# EAGLE board C_in_BRD (EAGLE 9.6.2)
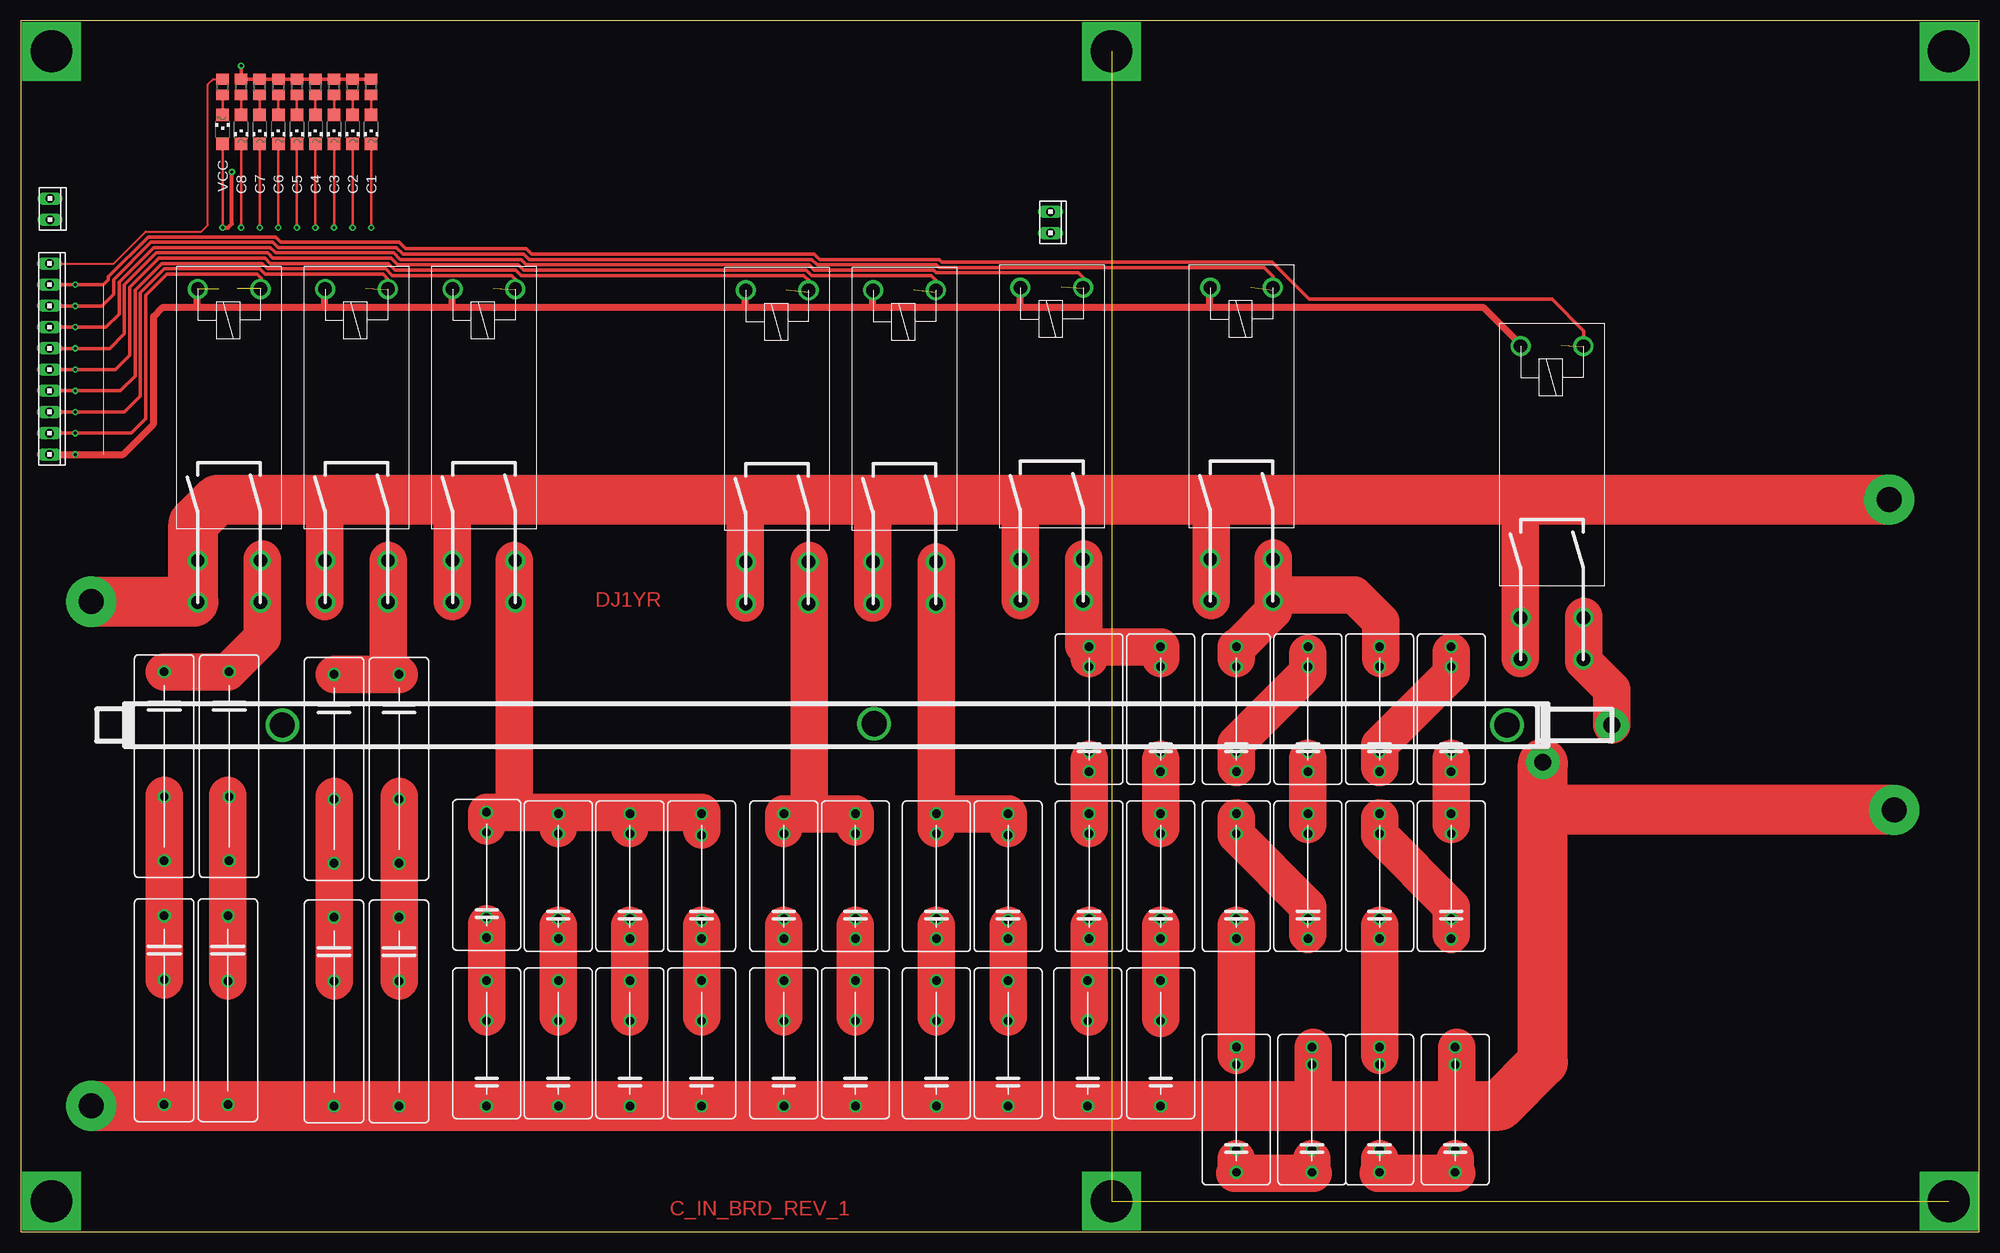
[diagram p0: board, top side]
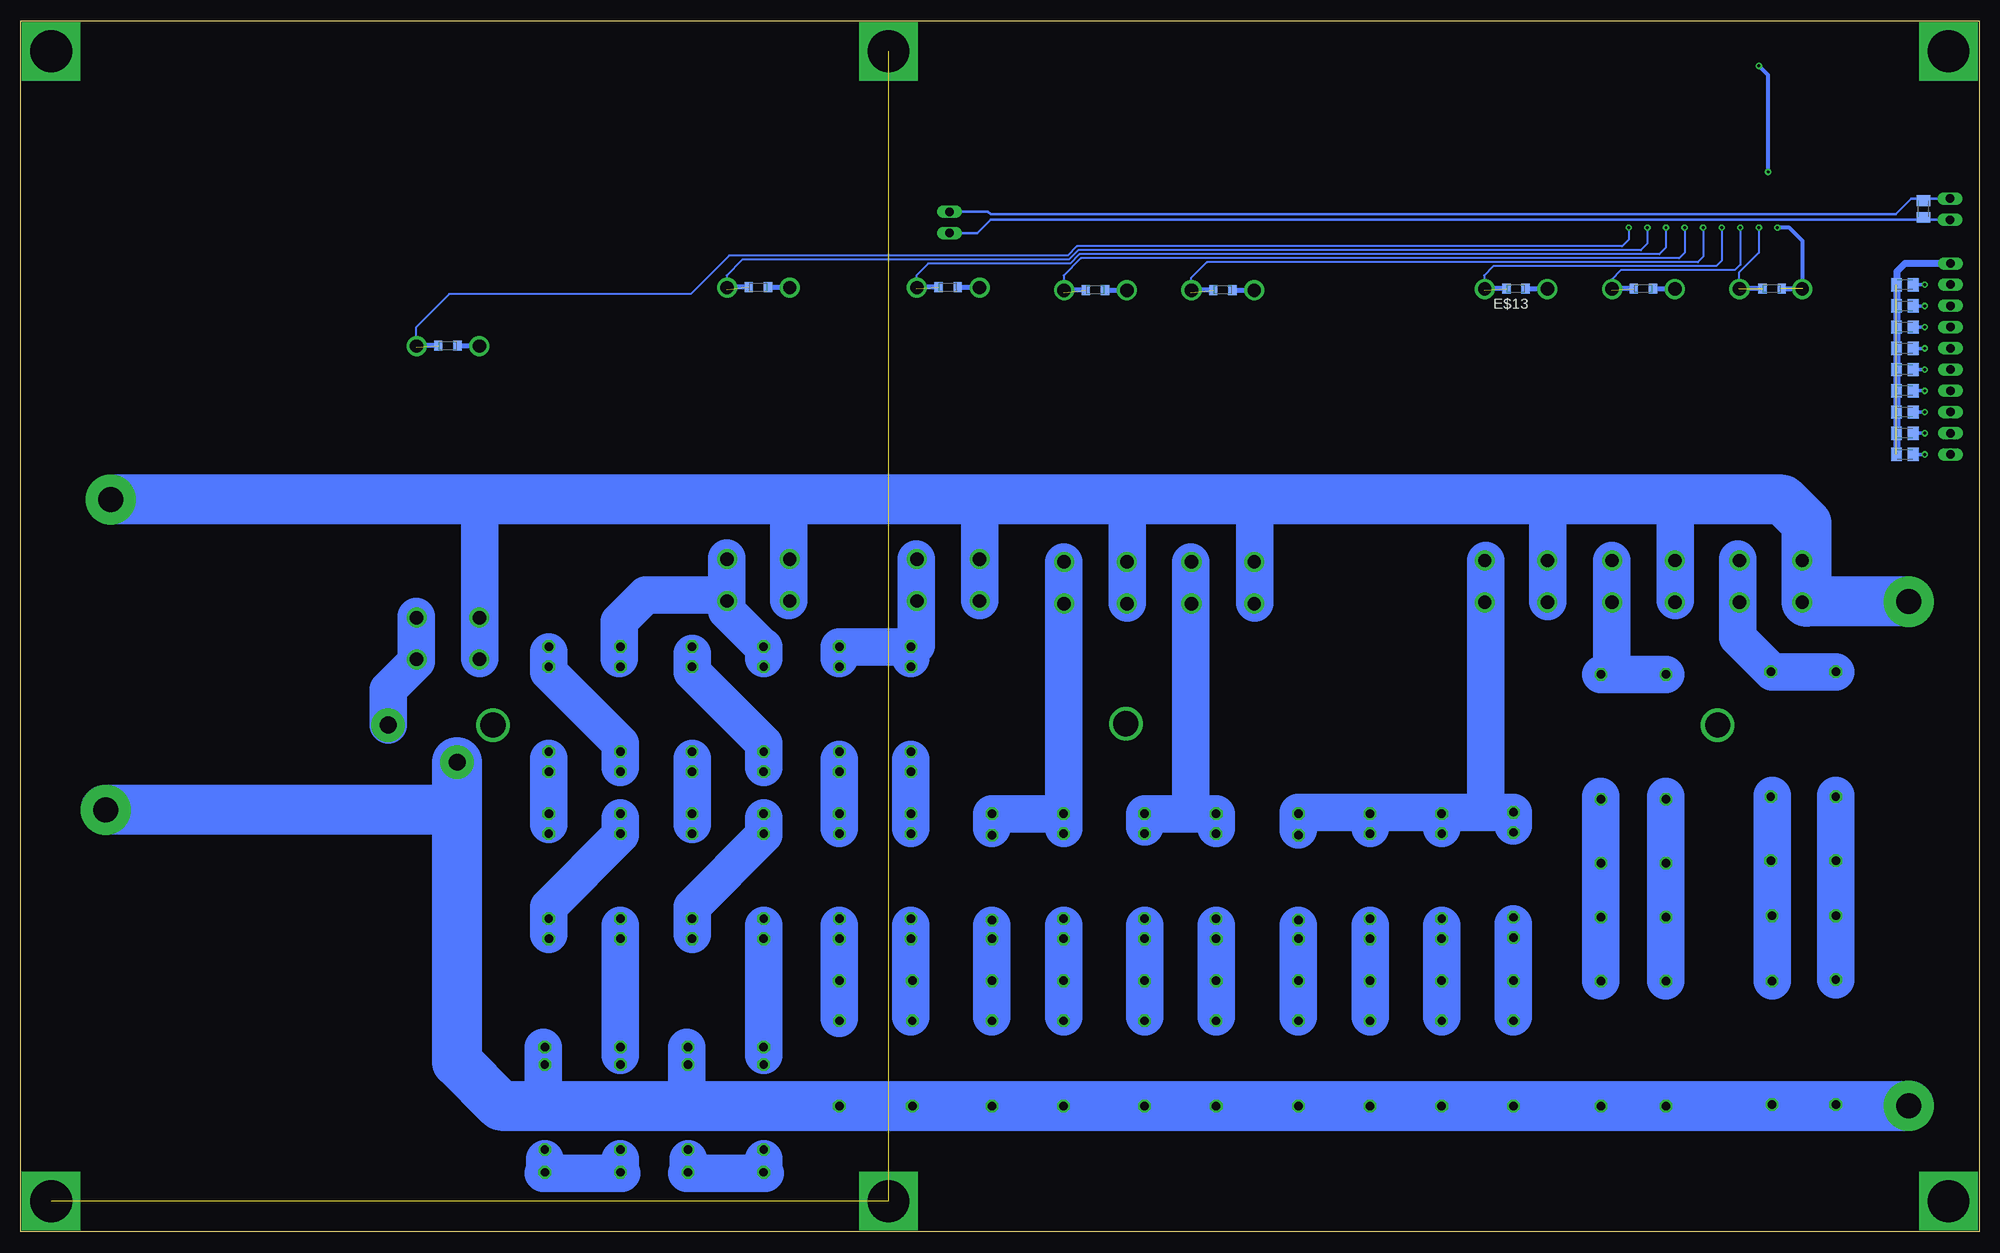
[diagram p1: board, bottom side, seen from below]

Size 234.29 x 144.92 mm. Coordinates in mm from the lower left corner, seen from the top.
Outline: 0,0 234.29,0 234.29,144.92 0,144.92 0,0
Copper layers (1*16): Top 0.035mm / dielectric 1.5mm / Bottom 0.035mm
Design rules "default *": minimum track width 6mil, minimum drill 0.35mm, track to track 6mil, track to pad 6mil, pad to pad 6mil, via to via 6mil, smd to smd 6mil, copper to edge 0mil, drill to drill 6mil, minimum pad ring 10mil, minimum via ring 8mil, stop-mask expansion 4mil, vias tented up to drill 0mil, thermal gap 10mil

## Footprints (pad centres in the part's own frame; a part is rotated, then mirrored left to right if it is on the bottom)
CHIPLED_1206 = smd 1.5 x 1.5: A 0,-1.75; C 0,1.75
C225-074X268 = drill 1.016 octagon: 1 -11.303,0; 2 11.303,0
C150-084X183 = drill 1.016 octagon: 1 -7.493,0; 2 7.493,0
10X10MTA = drill 1.016 long: 1 11.43,0; 2 8.89,0; 3 6.35,0; 4 3.81,0; 5 1.27,0; 6 -1.27,0; 7 -3.81,0; 8 -6.35,0; 9 -8.89,0; 10 -11.43,0
C0805K = smd 1.3 x 1.6: 1 -1,0; 2 1,0
SOD110-W = smd 1 x 1.2: A 1.15,0; C -1.15,0
10X02MTA = drill 1.016 long: 1 1.27,0; 2 -1.27,0
R0805 = smd 1.3 x 1.5: 1 -0.95,0; 2 0.95,0
FINDER45.91.7.024.0310 = drill 1.6: P$1 2.75,2.5; P$2 2.75,10; P$3 35.25,2.5; P$4 35.25,10; P$5 40.25,2.5; P$6 40.25,10

## Placement (x,y rotation side)
C1  [CHIPLED_1206]  41.91,131.92 180 top
C2  [CHIPLED_1206]  39.69,131.92 180 top
C3  [CHIPLED_1206]  37.47,131.92 180 top
C4  [CHIPLED_1206]  35.24,131.92 180 top
C5  [CHIPLED_1206]  33.02,131.92 180 top
C6  [CHIPLED_1206]  30.8,131.92 180 top
C7  [CHIPLED_1206]  28.57,131.92 180 top
C8  [CHIPLED_1206]  26.35,131.92 180 top
C_1  2200/2KV  [C225-074X268]  17.14,55.72 270 top
C_2  2200/2KV  [C225-074X268]  24.92,55.72 270 top
C_3  2200/2KV  [C225-074X268]  17.14,26.51 270 top
C_4  2200/2KV  [C225-074X268]  24.77,26.51 270 top
C_5  1000/2KV  [C225-074X268]  37.47,55.4 270 top
C_6  1000/2KV  [C225-074X268]  45.24,55.4 270 top
C_7  1000/2KV  [C225-074X268]  37.47,26.35 270 top
C_8  1000/2KV  [C225-074X268]  45.24,26.35 270 top
C_9  330/2KV  [C150-084X183]  55.72,42.7 90 top
C_10  330/2KV  [C150-084X183]  64.29,42.55 90 top
C_11  330/2KV  [C150-084X183]  55.72,22.54 90 top
C_12  330/2KV  [C150-084X183]  64.29,22.54 90 top
C_13  220/2KV  [C150-084X183]  72.87,42.55 90 top
C_14  220/2KV  [C150-084X183]  81.44,42.55 90 top
C_15  220/2KV  [C150-084X183]  72.87,22.54 90 top
C_16  220/2KV  [C150-084X183]  81.44,22.54 90 top
C_17  330/2KV  [C150-084X183]  91.28,42.55 90 top
C_18  330/2KV  [C150-084X183]  99.85,42.55 90 top
C_19  330/2KV  [C150-084X183]  91.28,22.54 90 top
C_20  330/2KV  [C150-084X183]  99.85,22.54 90 top
C_21  150/2KV  [C150-084X183]  109.54,42.55 90 top
C_22  150/2KV  [C150-084X183]  118.11,42.55 90 top
C_23  150/2KV  [C150-084X183]  109.54,22.54 90 top
C_24  150/2KV  [C150-084X183]  118.11,22.54 90 top
C_25  100/2KV  [C150-084X183]  127.79,62.55 90 top
C_26  100/2KV  [C150-084X183]  136.37,62.55 90 top
C_27  100/2KV  [C150-084X183]  127.79,42.55 90 top
C_28  100/2KV  [C150-084X183]  136.37,42.55 90 top
C_29  100/2KV  [C150-084X183]  127.64,22.54 90 top
C_30  100/2KV  [C150-084X183]  136.37,22.54 90 top
C_31  100/2KV  [C150-084X183]  145.41,62.55 90 top
C_32  100/2KV  [C150-084X183]  153.99,62.55 90 top
C_33  100/2KV  [C150-084X183]  145.41,42.55 90 top
C_34  100/2KV  [C150-084X183]  153.99,42.55 90 top
C_35  100/2KV  [C150-084X183]  145.41,14.61 90 top
C_36  100/2KV  [C150-084X183]  154.46,14.61 90 top
C_37  100/2KV  [C150-084X183]  162.56,62.55 90 top
C_38  100/2KV  [C150-084X183]  171.13,62.55 90 top
C_39  100/2KV  [C150-084X183]  162.56,42.55 90 top
C_40  100/2KV  [C150-084X183]  171.13,42.55 90 top
C_41  100/2KV  [C150-084X183]  162.56,14.61 90 top
C_42  100/2KV  [C150-084X183]  171.61,14.61 90 top
E$1  [10X10MTA]  3.43,104.47 270 top
E$2  [C0805K]  8.89,93.03 180 bottom
E$3  [C0805K]  8.89,95.57 180 bottom
E$4  [C0805K]  8.89,98.11 180 bottom
E$5  [C0805K]  8.89,100.65 180 bottom
E$6  [C0805K]  8.89,103.19 180 bottom
E$7  [C0805K]  8.89,105.73 180 bottom
E$8  [C0805K]  8.89,108.27 180 bottom
E$9  [C0805K]  8.89,110.81 180 bottom
E$10  [C0805K]  8.89,113.35 180 bottom
E$11  [SOD110-W]  24.77,112.87 180 bottom
E$12  [SOD110-W]  40.16,112.87 180 bottom
E$13  [SOD110-W]  55.4,112.87 180 bottom
E$14  [SOD110-W]  90.49,112.71 180 bottom
E$15  [SOD110-W]  105.73,112.71 180 bottom
E$16  [SOD110-W]  123.35,113.03 180 bottom
E$17  [SOD110-W]  146.05,113.03 180 bottom
E$18  [SOD110-W]  183.2,106.05 180 bottom
E$19  [10X02MTA]  3.49,122.4 270 top
E$20  [C0805K]  6.67,122.4 270 bottom
E$21  [10X02MTA]  123.19,120.81 270 top
E$22  [R0805]  24.13,137 90 top
E$23  [R0805]  26.35,137 90 top
E$24  [R0805]  28.57,137 90 top
E$25  [R0805]  30.8,137 90 top
E$26  [R0805]  33.02,137 90 top
E$27  [R0805]  35.24,137 90 top
E$28  [R0805]  37.47,137 90 top
E$29  [R0805]  39.69,137 90 top
E$30  [R0805]  41.91,137 90 top
U$1  FINDER45.91.7.024.0310  [FINDER45.91.7.024.0310]  176.94,108.75 270 top
U$2  FINDER45.91.7.024.0310  [FINDER45.91.7.024.0310]  139.79,115.74 270 top
U$3  FINDER45.91.7.024.0310  [FINDER45.91.7.024.0310]  117.09,115.74 270 top
U$4  FINDER45.91.7.024.0310  [FINDER45.91.7.024.0310]  99.47,115.42 270 top
U$5  FINDER45.91.7.024.0310  [FINDER45.91.7.024.0310]  84.23,115.42 270 top
U$6  FINDER45.91.7.024.0310  [FINDER45.91.7.024.0310]  49.15,115.58 270 top
U$7  FINDER45.91.7.024.0310  [FINDER45.91.7.024.0310]  33.91,115.58 270 top
U$8  FINDER45.91.7.024.0310  [FINDER45.91.7.024.0310]  18.67,115.58 270 top
VCC  [CHIPLED_1206]  24.13,131.92 0 top

## Library data of the parts
C1-C8 VCC = led
C_1-C_42 E$2-E$10 E$20 E$22-E$30 = rcl
E$1 E$19 E$21 = con-amp
E$11-E$18 = diode
U$1-U$8 = Finder 45.91.7.024.0310

## Nets
S$24: E$2.2 E$3.2 E$4.2 E$5.2 E$6.2 E$7.2 E$8.2 E$9.2 E$10.2
S$96: E$19.1
S$97: E$19.2 E$21.2

## Tracks (layer width: path | path; a pad name or v marks a point on that pad's centre or on a via)
+24V  (via drill 0.35)  (1 unrouted)
  Top 0.305: 24.13,130.18 v24.13,120.17
  Top 0.406: v26.35,139.54 26.35,137.95 | 26.35,137.95 26.35,137.79 | 26.35,137.95 41.91,137.95
  Top 0.508: v24.13,120.17 24.77,120.17 25.24,120.65 v25.24,126.84
  Top 0.813: 3.33,93.03 v6.51,93.03 12.22,93.03 15.88,96.68 15.88,109.54 16.99,110.65 21.11,110.65 | 21.11,110.65 36.35,110.65 | 36.35,110.65 51.59,110.65 | 51.59,110.65 86.68,110.65 | 86.68,110.65 101.92,110.65 | 101.92,110.65 119.54,110.65 | 119.54,110.65 142.24,110.65 | 21.11,110.65 21.11,112.87 | 36.35,110.65 v36.35,112.87 | 51.59,110.65 v51.59,112.87 | 86.68,110.65 v86.68,112.71 | 101.92,110.65 v101.92,112.71 | 119.54,110.65 v119.54,113.03 | 142.24,110.65 v142.24,113.03 | 142.24,110.65 174.94,110.65 v179.55,106.05
  Bottom 0.406: 6.67,93.03 v6.51,93.03 8.1,93.03
  Bottom 0.508: 21.11,112.87 21.11,118.59 22.7,120.17 v24.13,120.17 | v25.24,126.84 25.24,138.43 v26.35,139.54
  Bottom 0.61: 144.94,113.03 v142.24,113.03 | 122.24,113.03 v119.54,113.03 | 104.62,112.71 v101.92,112.71 | 89.38,112.71 v86.68,112.71 | 54.29,112.87 v51.59,112.87 | 39.05,112.87 v36.35,112.87 | 23.65,112.87 21.11,112.87 | 182.09,106.05 v179.55,106.05
C1  (via drill 0.35)  (1 unrouted)
  Top 0.305: 41.91,130.18 v41.91,120.17
  Top 0.406: 3.49,113.35 v6.51,113.35 9.84,113.35 10.48,113.98 10.48,114.3 15.24,119.06 30.48,119.06 31.11,118.43 45.24,118.43 46.04,117.63 60.48,117.63 61.12,117 94.93,117 95.57,116.36 109.86,116.36 110.17,116.05 149.7,116.05 154.15,111.6 183.2,111.6 187.01,107.79 187.01,105.89
  Bottom 0.254: v41.91,120.17 41.91,118.75 42.7,117.95 107.95,117.95 109.06,116.84 149.54,116.84 154.15,112.24 183.04,112.24 187.01,108.27 187.01,106.05
  Bottom 0.406: v6.51,113.35 7.78,113.35
  Bottom 0.61: 184.31,106.05 187.01,106.05
C2  (via drill 0.35)  (1 unrouted)
  Top 0.406: 3.49,110.81 v6.51,110.81 9.68,110.81 11.11,112.24 11.11,113.98 15.56,118.43 30.16,118.43 30.8,117.79 44.93,117.79 45.72,117 60.17,117 60.8,116.36 94.61,116.36 95.25,115.73 109.54,115.73 109.86,115.41 148.75,115.41 149.86,114.3 149.86,112.71
  Bottom 0.254: v39.69,120.17 39.69,118.27 40.48,117.47 107.79,117.47 108.9,116.36 147.96,116.36 149.86,114.46 149.86,113.03
  Bottom 0.406: v6.51,110.81 7.94,110.81
  Bottom 0.61: 147.16,113.03 149.86,113.03
C3  (via drill 0.35)  (1 unrouted)
  Top 0.406: 3.49,108.27 v6.51,108.27 10.16,108.27 11.75,109.86 11.75,113.67 15.88,117.79 29.84,117.79 30.48,117.16 44.61,117.16 45.4,116.36 59.85,116.36 60.48,115.73 94.3,115.73 94.93,115.09 109.22,115.09 109.54,114.78 126.52,114.78 127.16,114.14 127.16,112.87
  Bottom 0.254: v37.47,120.17 37.47,117.79 38.26,117 107.63,117 108.74,115.89 125.73,115.89 127.16,114.46 127.16,113.03
  Bottom 0.406: v6.51,108.27 7.78,108.27
  Bottom 0.61: 124.46,113.03 127.16,113.03
C4  (via drill 0.35)  (1 unrouted)
  Top 0.406: 3.33,105.73 v6.51,105.73 10.64,105.73 12.38,107.47 12.38,113.35 16.19,117.16 29.53,117.16 30.16,116.52 44.29,116.52 45.09,115.73 59.53,115.73 60.17,115.09 93.98,115.09 94.61,114.46 108.9,114.46 109.54,113.82 109.54,112.39
  Bottom 0.254: v35.24,120.17 35.24,117.16 35.88,116.52 107.47,116.52 109.54,114.46 109.54,112.71
  Bottom 0.406: v6.51,105.73 7.94,105.73
  Bottom 0.61: 106.84,112.71 109.54,112.71
C5  (via drill 0.35)  (1 unrouted)
  Top 0.406: 94.3,112.39 94.3,113.82 93.66,114.46 59.85,114.46 59.21,115.09 44.77,115.09 43.97,115.89 29.84,115.89 29.21,116.52 16.51,116.52 13.02,113.03 13.02,104.93 11.27,103.19 v6.51,103.19 3.49,103.19
  Bottom 0.254: v33.02,120.17 33.02,116.68 33.66,116.05 92.39,116.05 94.3,114.14 94.3,112.71
  Bottom 0.406: v6.51,103.19 7.94,103.19
  Bottom 0.61: 91.6,112.71 94.3,112.71
C6  (via drill 0.35)  (1 unrouted)
  Top 0.406: 59.21,112.71 59.21,113.98 58.74,114.46 44.45,114.46 43.66,115.25 29.53,115.25 28.89,115.89 16.83,115.89 13.65,112.71 13.65,102.39 11.91,100.65 v6.51,100.65 3.49,100.65
  Bottom 0.254: v30.8,120.17 30.8,116.2 31.43,115.57 58.1,115.57 59.21,114.46 59.21,112.87
  Bottom 0.406: v6.51,100.65 7.94,100.65
  Bottom 0.61: 56.52,112.87 59.21,112.87
C7  (via drill 0.35)  (1 unrouted)
  Top 0.406: 43.97,112.71 43.97,113.98 43.34,114.62 29.21,114.62 28.57,115.25 17.14,115.25 14.29,112.39 14.29,100.01 12.38,98.11 v6.51,98.11 3.49,98.11
  Bottom 0.254: v28.57,120.17 28.57,115.73 29.21,115.09 42.86,115.09 43.97,113.98 43.97,112.87
  Bottom 0.406: v6.51,98.11 7.94,98.11
  Bottom 0.61: 41.27,112.87 43.97,112.87
C8  (via drill 0.35)  (1 unrouted)
  Top 0.406: 28.73,112.87 28.73,114.14 28.26,114.62 17.46,114.62 14.92,112.08 14.92,97.31 13.18,95.57 v6.51,95.57 3.49,95.57
  Bottom 0.254: v26.35,120.17 26.35,117.16 28.73,114.78 28.73,112.87
  Bottom 0.406: v6.51,95.57 7.94,95.57
  Bottom 0.61: 25.88,112.87 28.73,112.87
GND
  Bottom 0.813: 3.49,115.89 8.89,115.89 9.84,114.94 9.84,93.03
N$43  (via drill 3 pad 6)
  Top 4.5: 154.62,22.07 154.62,15.24 154.78,15.08 | 171.77,22.07 171.77,15.08
  Top 6: v8.41,15.08 154.78,15.08 171.77,15.08 176.85,15.08 182.09,20.32 182.09,56.04
  Bottom 6: v8.41,15.08 176.85,15.08 182.09,20.32 182.09,56.2
S$1
  Bottom 4.5: 37.47,30 37.47,52.07
S$2
  Bottom 4.5: 28.89,80.49 28.89,71.12 24.77,66.99 17.14,66.99
S$3
  Bottom 4.5: 24.77,30 24.77,52.23
S$4
  Bottom 4.5: 45.24,30 45.24,52.07
S$5
  Bottom 4.5: 64.29,25.72 64.29,36.67
S$6
  Bottom 4.5: 37.47,66.67 43.97,66.67 | 43.97,66.67 45.24,66.67 | 43.97,80.33 43.97,66.67
S$7
  Bottom 4.5: 59.05,80.33 59.05,50.32
S$8
  Bottom 4.5: 55.88,50.16 72.87,50.16 | 72.87,50.16 81.44,50.16 | 72.87,50.16 72.87,48.26
S$9  (via drill 3 pad 6)
  Top 6: v8.41,75.41 20.64,75.41 20.64,84.77 23.5,87.63 v223.52,87.63
  Bottom 4.5: 36.35,75.56 36.35,87.63 | 51.59,75.41 51.59,87.63 | 179.39,68.58 179.39,87.63
  Bottom 6: v8.41,75.41 20.64,75.41 20.64,84.77 23.5,87.63 36.35,87.63 51.59,87.63 179.39,87.63 v223.52,87.63
S$10
  Bottom 4.5: 127.16,80.49 127.16,70.17 127.32,70.01 127.79,70.01 | 127.79,70.01 136.37,70.01 136.37,68.58 | 127.79,70.01 127.79,68.58
S$11
  Bottom 4.5: 99.85,48.42 99.85,50.01 91.28,50.01 91.28,48.26
S$12  (via drill 3 pad 6)
  Top 6: v224.16,50.48 183.36,50.48
S$13
  Top 4.5: 17.14,66.99 24.77,66.99 28.89,71.12 28.89,80.49
S$14
  Top 4.5: 36.35,75.41 36.35,86.2
S$15
  Top 4.5: 43.97,80.33 43.97,66.67 | 43.97,66.67 45.24,66.67 | 43.97,66.67 37.47,66.67
S$16
  Bottom 4.5: 109.54,50.01 118.11,50.01 118.11,48.26 | 109.54,80.17 109.54,50.01 | 109.54,50.01 109.54,48.26
S$17
  Bottom 4.5: 145.73,70.17 149.86,74.3 149.86,76.2 | 149.86,76.2 149.86,80.64 | 149.86,76.2 159.54,76.2 162.72,73.03 162.72,68.58
S$18
  Bottom 4.5: 145.41,55.56 145.41,58.42 153.99,66.99 153.99,69.22
S$19
  Bottom 4.5: 153.99,48.74 153.99,56.67
S$20
  Bottom 4.5: 145.41,49.53 145.41,47.47 153.99,38.89 153.99,35.56
S$21
  Bottom 4.5: 145.41,36.67 145.41,21.11
S$22
  Bottom 4.5: 145.26,6.99 154.62,6.99
S$23
  Bottom 4.5: 154.62,22.07 154.62,15.24
S$24  (8 unrouted)
S$25
  Bottom 4.5: 162.56,55.56 162.56,58.42 171.13,66.99 171.13,69.37
S$26
  Bottom 4.5: 171.13,48.74 171.13,56.67
S$27
  Bottom 4.5: 162.56,49.53 162.56,47.47 171.13,38.89 171.13,35.56
S$28
  Bottom 4.5: 162.56,36.67 162.56,21.11
S$29
  Bottom 4.5: 162.4,6.99 171.77,6.99
S$30
  Bottom 4.5: 171.77,22.07 171.77,15.24
S$31
  Top 4.5: 51.59,75.41 51.59,87.95
S$32
  Top 4.5: 59.05,80.33 59.05,50.16 | 59.05,50.16 55.88,50.16 | 59.05,50.16 81.44,50.16
S$33
  Top 4.5: 86.68,75.25 86.68,87.47
S$34
  Top 4.5: 94.3,80.33 94.3,50.01 | 94.3,50.01 91.28,50.01 91.28,48.26 | 94.3,50.01 99.85,50.01 99.85,48.42
S$35  (via drill 2 pad 4)
  other vias: 182.09,56.2
S$36
  Top 4.5: 101.92,75.25 101.92,86.52
S$37  (via drill 3 pad 4)
  other vias: 31.27,60.64
S$38  (via drill 3 pad 4)
  other vias: 102.08,60.8
S$39  (via drill 3 pad 4)
  other vias: 177.8,60.64
S$40
  Top 4.5: 109.54,25.72 109.54,36.67
S$41
  Top 4.5: 109.54,80.17 109.54,50.01 | 109.54,50.01 118.11,50.01 118.11,48.26 | 109.54,50.01 109.54,48.26
S$42
  Top 4.5: 119.54,75.56 119.54,88.27
S$43  (via drill 5 pad 7)
  other vias: 3.65,141.29
S$44  (via drill 5 pad 7)
  other vias: 3.65,3.65
S$45  (via drill 5 pad 7)  (2 unrouted)
  other vias: 230.66,3.65 130.49,3.65 130.49,141.29
S$46  (via drill 5 pad 7)
  other vias: 230.66,141.29
S$47
  Bottom 4.5: 94.3,80.17 94.3,50.32
S$48
  Top 4.5: 127.16,80.49 127.16,70.17 127.32,70.01 136.37,70.01 136.37,68.58
S$49
  Top 4.5: 142.4,75.56 142.4,87.47
S$50
  Top 4.5: 145.57,70.01 149.86,74.3 149.86,80.64
S$51
  Top 4.5: 151.29,76.2 159.54,76.2 162.72,73.03 162.72,68.58
S$52
  Top 4.5: 179.39,68.58 179.39,87.47
S$53  (via drill 2 pad 4)
  Top 4.5: 187.01,73.66 187.01,68.26 190.34,64.93 v190.34,60.64
  Bottom 4.5: 187.01,73.66 187.01,68.26 190.34,64.93 v190.34,60.64
S$54
  Top 4.5: 17.14,30.16 17.14,52.23
S$55
  Top 4.5: 24.77,30 24.77,52.23
S$56
  Top 4.5: 37.47,30 37.47,52.07
S$57
  Top 4.5: 45.24,30 45.24,52.07
S$58
  Top 4.5: 55.72,25.72 55.72,36.83
S$59
  Top 4.5: 64.29,25.72 64.29,36.67
S$60
  Top 4.5: 72.87,25.72 72.87,36.67
S$61
  Top 4.5: 81.44,25.72 81.44,36.67
S$62
  Top 4.5: 91.28,25.72 91.28,36.67
S$63
  Top 4.5: 99.85,25.72 99.85,36.67
S$64
  Top 4.5: 118.11,25.72 118.11,36.67
S$65
  Top 4.5: 127.79,25.72 127.79,36.67
S$66
  Top 4.5: 136.37,25.56 136.37,36.67
S$67
  Top 4.5: 145.41,21.11 145.41,36.67
S$68
  Top 4.5: 162.56,21.11 162.56,36.67
S$69
  Top 4.5: 171.13,35.56 171.13,38.89 162.56,47.47 162.56,49.53
S$70
  Top 4.5: 153.99,35.56 153.99,38.89 145.41,47.47 145.41,49.53
S$71
  Top 4.5: 127.79,48.26 127.79,56.52
S$72
  Top 4.5: 136.37,48.26 136.37,56.52
S$73
  Top 4.5: 153.99,48.74 153.99,56.67
S$74
  Top 4.5: 171.13,48.74 171.13,56.67
S$75
  Top 4.5: 162.56,55.56 162.56,58.26 171.13,66.83 171.13,69.37
S$76
  Top 4.5: 145.41,55.56 145.41,58.42 153.99,66.99 153.99,69.22
S$77
  Top 4.5: 145.26,6.99 145.41,6.99 | 145.41,6.99 154.62,6.99 | 145.41,6.99 145.41,8.73
S$78
  Top 4.5: 162.4,6.99 171.77,6.99
S$79
  Bottom 4.5: 142.4,75.56 142.4,87.47
S$80
  Bottom 4.5: 119.54,75.56 119.54,87.47
S$81
  Bottom 4.5: 101.92,75.25 101.92,87.47
S$82
  Bottom 4.5: 86.68,75.25 86.68,87.47
S$83
  Bottom 6: 182.25,50.32 182.4,50.48 224.16,50.48
S$84
  Bottom 4.5: 17.14,30.16 17.14,52.23
S$85
  Bottom 4.5: 127.79,48.26 127.79,56.52
S$86
  Bottom 4.5: 136.37,48.26 136.37,56.52
S$87
  Bottom 4.5: 136.37,25.56 136.37,36.67
S$88
  Bottom 4.5: 127.79,25.72 127.79,36.67
S$89
  Bottom 4.5: 118.11,25.72 118.11,36.67
S$90
  Bottom 4.5: 109.54,25.72 109.54,36.67
S$91
  Bottom 4.5: 99.85,25.72 99.85,36.67
S$92
  Bottom 4.5: 91.28,25.72 91.28,36.67
S$93
  Bottom 4.5: 81.44,25.72 81.44,36.67
S$94
  Bottom 4.5: 72.87,25.72 72.87,36.67
S$95
  Bottom 4.5: 55.72,25.72 55.72,36.83
S$96
  Bottom 0.305: E$19.1 118.27,121.13 119.86,119.54 123.19,119.54
S$97
  Bottom 0.305: E$19.2 8.1,123.67 10,121.76 118.27,121.76 118.59,122.08 E$21.2
S$98
  Top 0.254: 3.49,115.89 11.11,115.89 14.92,119.7 21.59,119.7 22.38,120.49 22.38,137.32 23.02,137.95 24.13,137.95
S$101  (via drill 1)
  other vias: 17.14,30.16
S$102
  Top 4.5: 154.46,7.14 154.46,8.73
S$103  (via drill 1)
  other vias: 24.77,30
S$104
  Top 4.5: 162.56,7.14 162.56,8.73
S$105  (via drill 1)
  other vias: 37.47,30
S$106
  Top 0.305: 26.35,130.18 26.35,120.17
S$107
  Top 0.305: 28.57,130.18 28.57,120.17
S$108
  Top 0.305: 30.8,130.18 30.8,120.17
S$109
  Top 0.305: 33.02,130.18 33.02,120.17
S$110
  Top 0.305: 35.24,130.18 35.24,120.17
S$111
  Top 0.305: 37.47,130.18 37.47,120.17
S$112
  Top 0.305: 39.69,130.18 39.69,120.17
S$113
  Top 4.5: 171.61,7.14 171.61,8.73
S$114
  Top 0.305: 24.13,133.51 24.13,136.05
S$115
  Top 0.305: 26.35,133.67 26.35,136.05
S$116
  Top 0.305: 28.57,133.67 28.57,136.05
S$117
  Top 0.305: 30.8,133.83 30.8,136.05
S$118
  Top 0.305: 33.02,133.67 33.02,136.05
S$119
  Top 0.305: 35.24,133.83 35.24,136.05
S$120
  Top 0.305: 37.47,133.67 37.47,136.05
S$121
  Top 0.305: 39.69,133.67 39.69,136.05
S$122
  Top 0.305: 41.91,133.67 41.91,136.05
S$123  (via drill 1)
  other vias: 45.24,30
S$124
  Top 4.5: 127.79,70.17 127.79,68.58
S$125  (via drill 1)
  other vias: 55.72,25.24
S$126  (via drill 1)
  other vias: 17.14,52.07
S$127
  Top 4.5: 145.41,70.01 145.41,68.58
S$128  (via drill 1)
  other vias: 24.92,52.07
S$129  (via drill 1)
  other vias: 64.29,25.24
S$130  (via drill 1)
  other vias: 37.47,51.75
S$131
  Top 4.5: 55.72,50.16 55.72,48.58
S$132  (via drill 1)
  other vias: 45.24,51.75
S$133  (via drill 1)
  other vias: 72.87,25.24
S$134
  Top 4.5: 64.29,50.01 64.29,48.26
S$135  (via drill 1)
  other vias: 81.44,25.24
S$136
  Top 4.5: 72.87,50.01 72.87,48.26
S$137  (via drill 1)
  other vias: 91.28,25.24
S$138
  Top 4.5: 81.44,50.01 81.44,48.1
S$139  (via drill 1)
  other vias: 109.54,25.24
S$140
  Bottom 4.5: 145.41,7.14 145.41,8.73
S$141  (via drill 1)
  other vias: 118.11,25.24
S$142
  Bottom 4.5: 154.46,7.14 154.46,8.73
S$143  (via drill 1)
  other vias: 127.64,25.24
S$144
  Bottom 4.5: 162.56,7.14 162.56,8.73
S$145  (via drill 1)
  other vias: 136.37,25.24
S$146
  Bottom 4.5: 171.61,7.14 171.61,8.73
S$147  (via drill 1)
  other vias: 145.41,20
S$148  (via drill 1)
  other vias: 145.41,9.84
S$149  (via drill 1)
  other vias: 154.46,20
S$150  (via drill 1)
  other vias: 154.46,9.84
S$151  (via drill 1)
  other vias: 162.56,20
S$152  (via drill 1)
  other vias: 162.56,9.84
S$153  (via drill 1)
  other vias: 171.61,20
S$154  (via drill 1)
  other vias: 171.61,9.84
S$155  (via drill 1)
  other vias: 171.13,47.62
S$156  (via drill 1)
  other vias: 171.13,37.47
S$157  (via drill 1)
  other vias: 162.56,47.62
S$158  (via drill 1)
  other vias: 162.56,37.47
S$159  (via drill 1)
  other vias: 153.99,47.62
S$160  (via drill 1)
  other vias: 153.99,37.47
S$161  (via drill 1)
  other vias: 145.41,47.62
S$162  (via drill 1)
  other vias: 145.41,37.47
S$163  (via drill 1)
  other vias: 136.37,47.62
S$164  (via drill 1)
  other vias: 136.37,37.47
S$165  (via drill 1)
  other vias: 127.79,47.62
S$166  (via drill 1)
  other vias: 127.79,37.47
S$167  (via drill 1)
  other vias: 127.79,67.63
S$168  (via drill 1)
  other vias: 127.79,57.47
S$169  (via drill 1)
  other vias: 136.37,67.63
S$170  (via drill 1)
  other vias: 136.37,57.47
S$171  (via drill 1)
  other vias: 145.41,67.63
S$172  (via drill 1)
  other vias: 145.41,57.47
S$173  (via drill 1)
  other vias: 153.99,67.63
S$174  (via drill 1)
  other vias: 153.99,57.47
S$175  (via drill 1)
  other vias: 162.56,67.63
S$176  (via drill 1)
  other vias: 162.56,57.47
S$177  (via drill 1)
  other vias: 171.13,67.63
S$178  (via drill 1)
  other vias: 171.13,57.47
S$179  (via drill 1)
  other vias: 55.72,47.78
S$180  (via drill 1)
  other vias: 55.72,37.62
S$181  (via drill 1)
  other vias: 64.29,47.62
S$182  (via drill 1)
  other vias: 64.29,37.47
S$183  (via drill 1)
  other vias: 72.87,47.62
S$184  (via drill 1)
  other vias: 72.87,37.47
S$185  (via drill 1)
  other vias: 81.44,47.47
S$186  (via drill 1)
  other vias: 81.44,37.31
S$187  (via drill 1)
  other vias: 91.28,47.62
S$188  (via drill 1)
  other vias: 91.28,37.47
S$189  (via drill 1)
  other vias: 99.85,47.62
S$190  (via drill 1)
  other vias: 99.85,37.47
S$191  (via drill 1)
  other vias: 109.54,47.62
S$192  (via drill 1)
  other vias: 109.54,37.47
S$193  (via drill 1)
  other vias: 118.11,47.47
S$194  (via drill 1)
  other vias: 118.11,37.31
S$195  (via drill 1)
  other vias: 99.85,25.24
S$196
  Bottom 4.5: 145.41,70.01 145.41,68.58
S$197
  Bottom 4.5: 81.44,50.01 81.44,48.1
S$198
  Bottom 4.5: 64.29,50.01 64.29,48.26
S$199
  Bottom 4.5: 55.72,50.16 55.72,48.58

## Text on the board
Top: DJ1YR | C_IN_BRD_REV_1